# Altium PCB EndCap2.PcbDoc
Units mm, origin at the board's own origin, x right, y up, seen from the top; angles counter-clockwise.
Board outline 103 x 53 mm, 2 copper layers (Top Layer, Bottom Layer); 2 components, 0 nets, 6 pads, 0 vias.
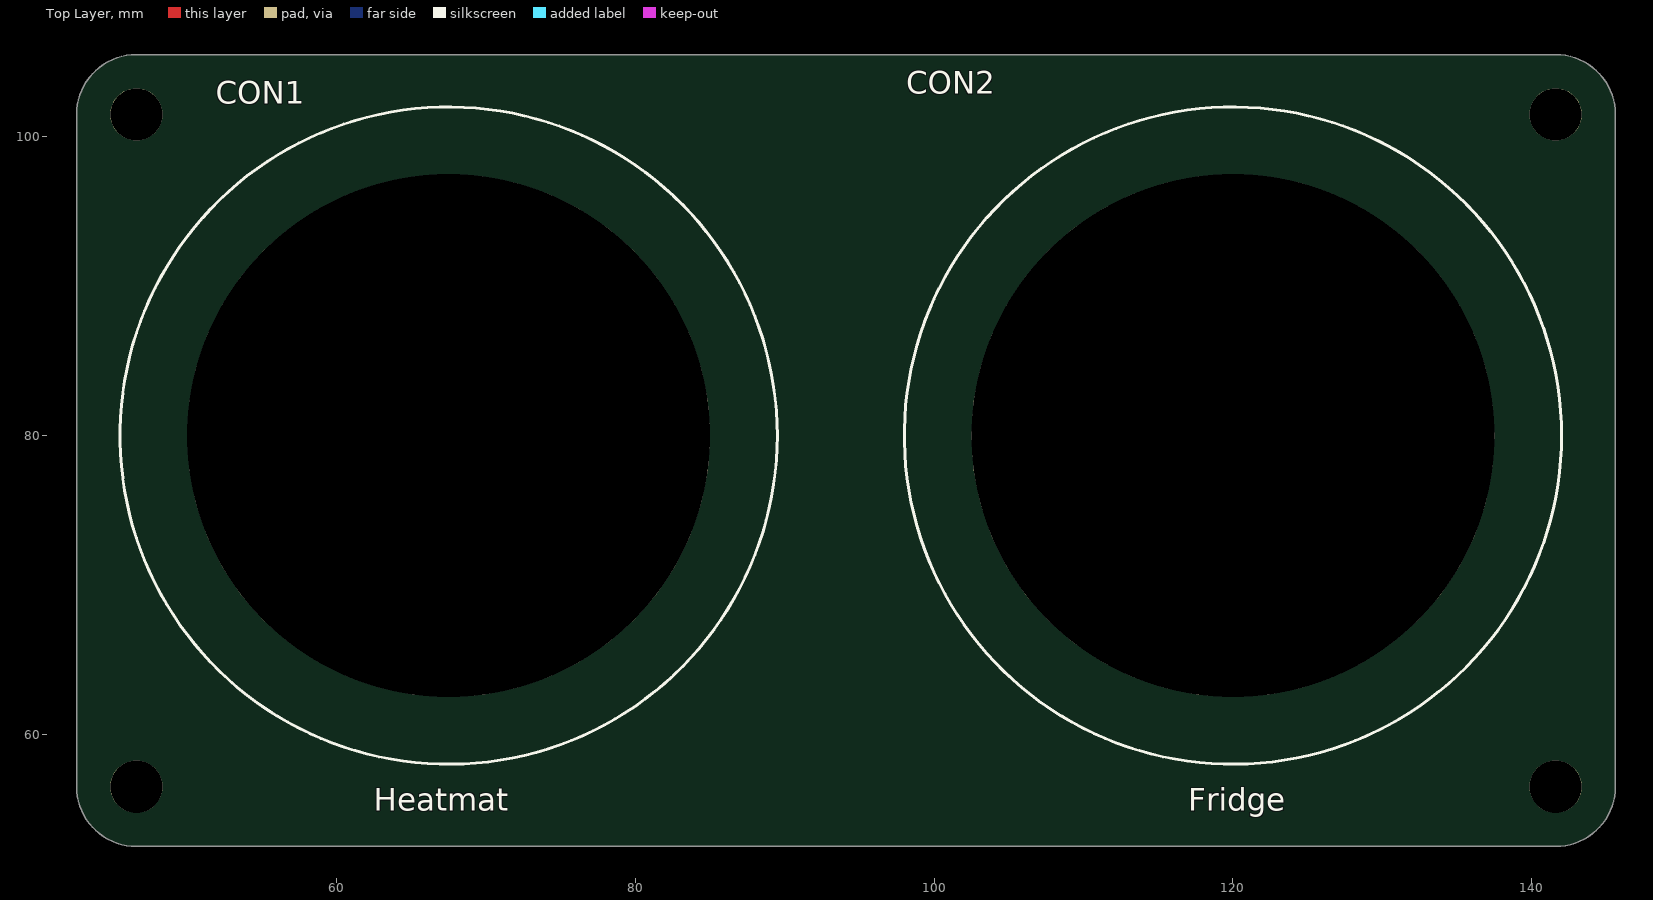
[diagram p0: Top Layer view]
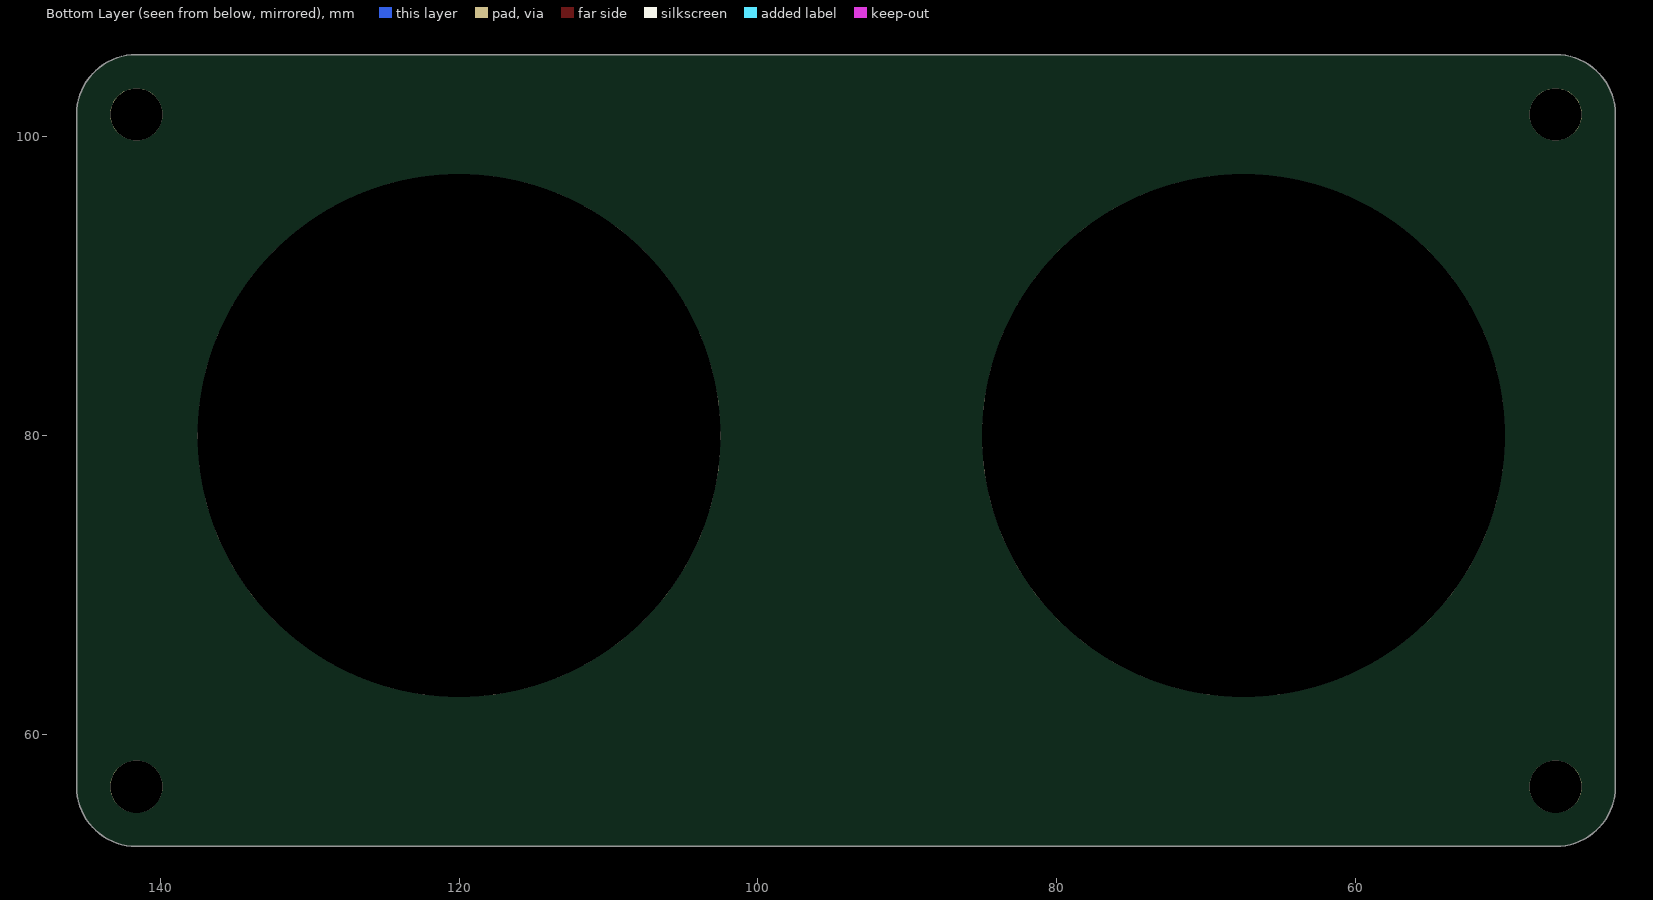
[diagram p1: Bottom Layer view, seen from below]

## Layer stack, top to bottom
Top Solder: solder mask 0.0102, Solder Resist, Dk 3.5
Top Layer: signal copper 0.0356
Dielectric 1: dielectric 0.32, FR-4, Dk 4.8
Bottom Layer: signal copper 0.0356
Bottom Solder: solder mask 0.0102, Solder Resist, Dk 3.5

## Board outline
42.6,56.5 42.6,101.5 cw(c46.6,101.5) 46.6,105.5 141.6,105.5 cw(c141.6,101.5) 145.6,101.5 145.6,56.5 cw(c141.6,56.5) 141.6,52.5 46.6,52.5 cw(c46.6,56.5)

## Design rules (kind name [scope] priority, off if disabled: settings)
Clearance [All] p1: gap=0.254
PolygonConnect [All] p1: connectstyle=Relief reliefconductorwidth=0.254 reliefentries=4 polygonreliefangle="90 Angle" airgapwidth=0.254
RoutingVias [All] p1: holewidth=0.711 width=1.27 viastyle="Through Hole" minholewidth=0.711 minwidth=1.27 maxholewidth=0.711 maxwidth=1.27
SolderMaskExpansion [All] p1: expansion=0.102
Width [All] p1: maxlimit=0.254 minlimit=0.254 preferedwidth=0.254
30 further rules are at their usual default settings.

## Components (designator, comment, footprint, x,y, rotation, side; value= is the part's Value field where it differs from the comment)
CON1 "Heatmat" RA-02 67.5,80 r0 top
CON2 "Fridge" RA-02 120,80 r0 top

## Footprints (in the part's own frame and the unit in brackets; to place one, negate y for a bottom-side part, rotate by r counter-clockwise, add the part's x,y. Pads: shape width x height; smd on the part's side, far side on the other; paste and mask are expansions set on the pad)
RA-02 [mm]
  round 35 hole 35 unplated: 3(0,0)
  silkscreen extent -22,-22 22,22

## Part data
CON1 CON2: library part RA-02, "Panel mount mains output socket"

## Free pads (board coordinates)
  round 3.5 hole 3.5 unplated: 0(46.6,56.5) 0(46.6,101.5) 0(141.6,56.5) 0(141.6,101.5)

## Nets (pads, with @x,y where several pads share a name; then routed paths per layer and width w, separated by ;. In a path a pad name is that pad's centre, name@x,y a point inside that pad or via, vN(x,y) a via of type N, cw(c..) or ccw(c..) an arc to the next point about the centre after c; other vN are vias at no path point)
pads on no net: CON1.3 CON2.3

## Silkscreen, mask and mechanical layers (free items; w line width, h text height)
M2BoardOutline:
  the board outline again, w0.2